# EAGLE board ParticleTest (EAGLE 9.2.2)
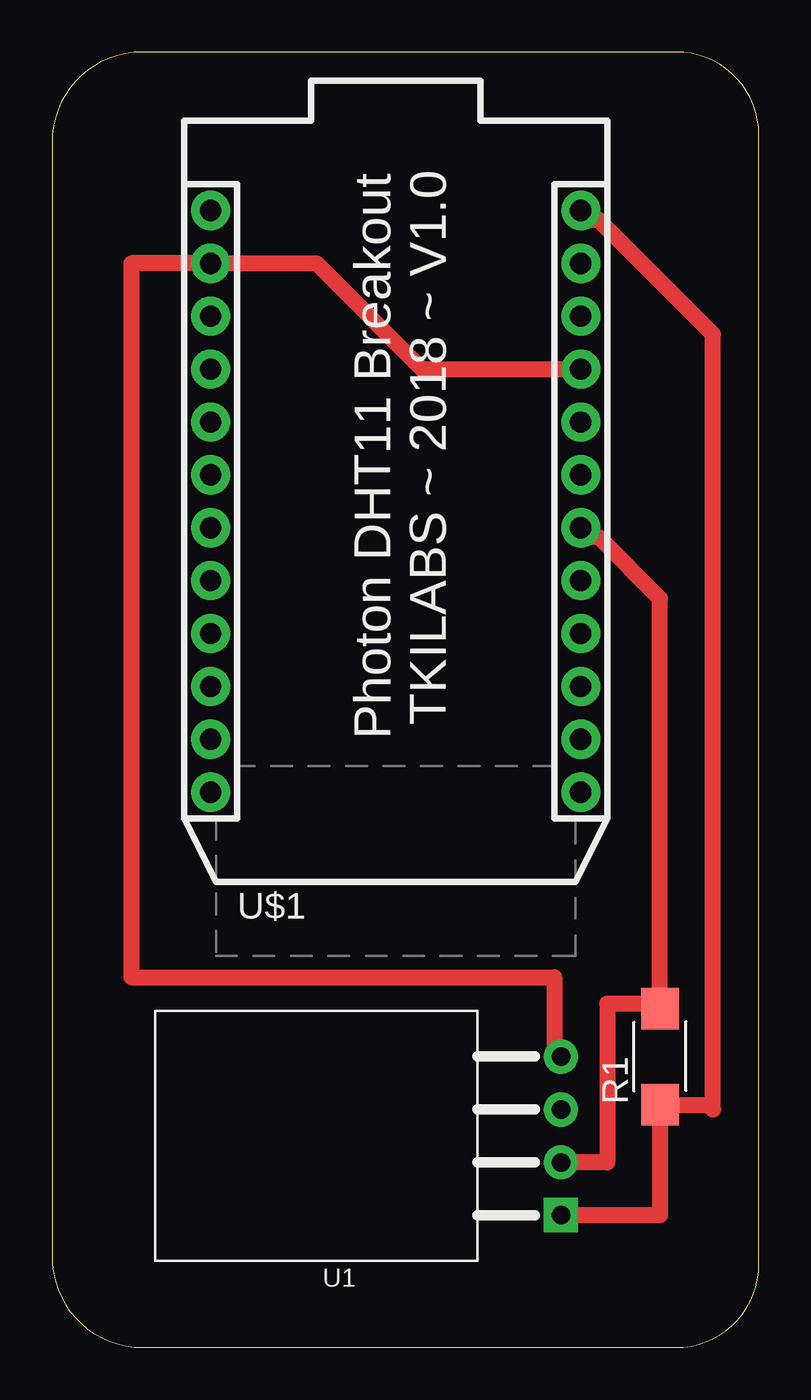
[diagram p0: board, top side]

Size 33.96 x 62.22 mm. Coordinates in mm from the lower left corner, seen from the top.
Outline: 0,57.9 0,4.34 arc90 4.34,0 29.97,0 arc90 33.96,3.99 33.96,58.25 arc90 29.99,62.22 4.32,62.22 arc90 0,57.9
Copper layers (1*16): Top 0.035mm / dielectric 1.5mm / Bottom 0.035mm
Design rules "default *": minimum track width 30mil, minimum drill 0.35mm, track to track 30mil, track to pad 30mil, pad to pad 30mil, via to via 30mil, smd to smd 30mil, copper to edge 40mil, drill to drill 6mil, minimum pad ring 10mil, minimum via ring 8mil, stop-mask expansion 4mil, vias tented up to drill 0mil, thermal gap 10mil

## Footprints (pad centres in the part's own frame; a part is rotated, then mirrored left to right if it is on the bottom)
R2010W = smd 2 x 1.8: 1 -2.311,0; 2 2.311,0
SNR4-2.54-15.5X12.0X5.5MM = drill 0.889 pad 1.651 square: 1 -11.75,3.81 | drill 0.889 pad 1.651: 2 -11.75,1.27; 3 -11.75,-1.27; 4 -11.75,-3.81
PHOTON = drill 1.016 pad 1.88: 1 1.27,33.02; 2 1.27,30.48; 3 1.27,27.94; 4 1.27,25.4; 5 1.27,22.86; 6 1.27,20.32; 7 1.27,17.78; 8 1.27,15.24; 9 1.27,12.7; 10 1.27,10.16; 11 1.27,7.62; 12 1.27,5.08; 13 19.05,5.08; 14 19.05,7.62; 15 19.05,10.16; 16 19.05,12.7; 17 19.05,15.24; 18 19.05,17.78; 19 19.05,20.32; 20 19.05,22.86; 21 19.05,25.4; 22 19.05,27.94; 23 19.05,30.48; 24 19.05,33.02

## Placement (x,y rotation side)
R1  [R2010W]  29.21,13.97 90 top
U1  DHT11  [SNR4-2.54-15.5X12.0X5.5MM]  12.7,10.16 180 top
U$1  PHOTON_WITH_HEADERS  [PHOTON]  6.35,21.59 0 top

## Library data of the parts
R1 = adafruit
U1 = Seeed-Sensor; MPN: DHT11
U$1 = Particle-Devices

## Nets
GND: U1.4 U$1.2 U$1.21
N$1: R1.2 U1.2 U$1.18
VBAT: U$1.22
VDD: R1.1 U1.1 U$1.24
VIN: U$1.1

## Tracks (layer width: path | path; a pad name or v marks a point on that pad's centre or on a via)
GND
  Top 0.762: U$1.21 17.78,46.99 12.7,52.07 U$1.2 3.81,52.07 3.81,17.78 24.13,17.78 24.13,14.29 U1.4
N$1
  Top 0.762: U1.2 26.67,8.89 26.67,16.51 28.98,16.51 R1.2 29.21,35.97 26.26,38.91 25.86,38.91 U$1.18
VDD
  Top 0.762: U1.1 29.21,6.35 R1.1 31.52,11.66 31.75,11.43 31.75,48.67 26.26,54.15 25.86,54.15 U$1.24

## Text on the board
tNames: Photon DHT11 Breakout / TKILABS ~ 2018 ~ V1.0